# Altium PCB version2.PcbDoc
Units mil, origin at the board's own origin, x right, y up, seen from the top; angles counter-clockwise.
Board outline 4230 x 3620 mil, 2 copper layers (Top Layer, Bottom Layer); 50 components, 105 nets, 238 pads, 27 vias.
Unrouted connection lines stored in the file: 14.
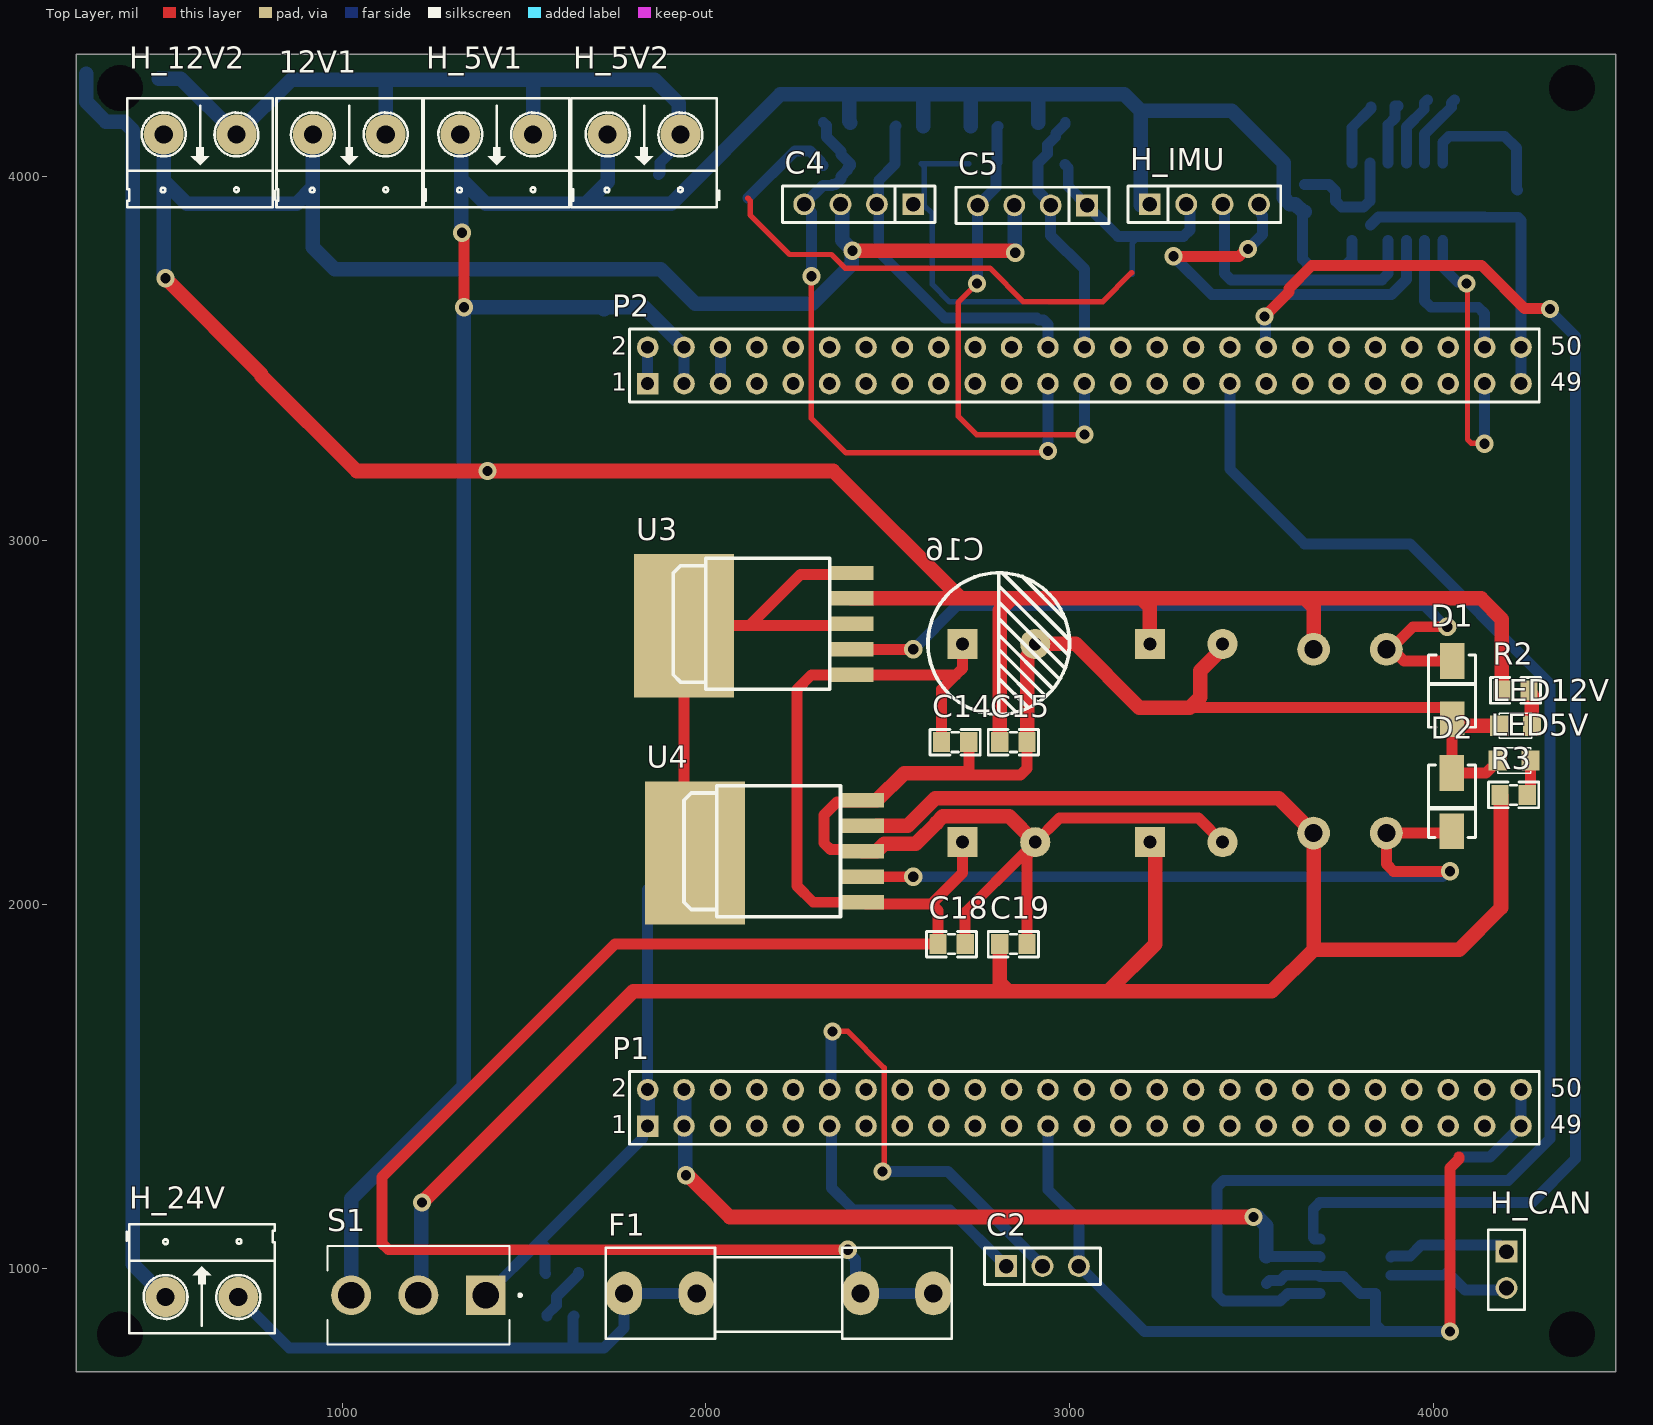
[diagram p0: Top Layer view]
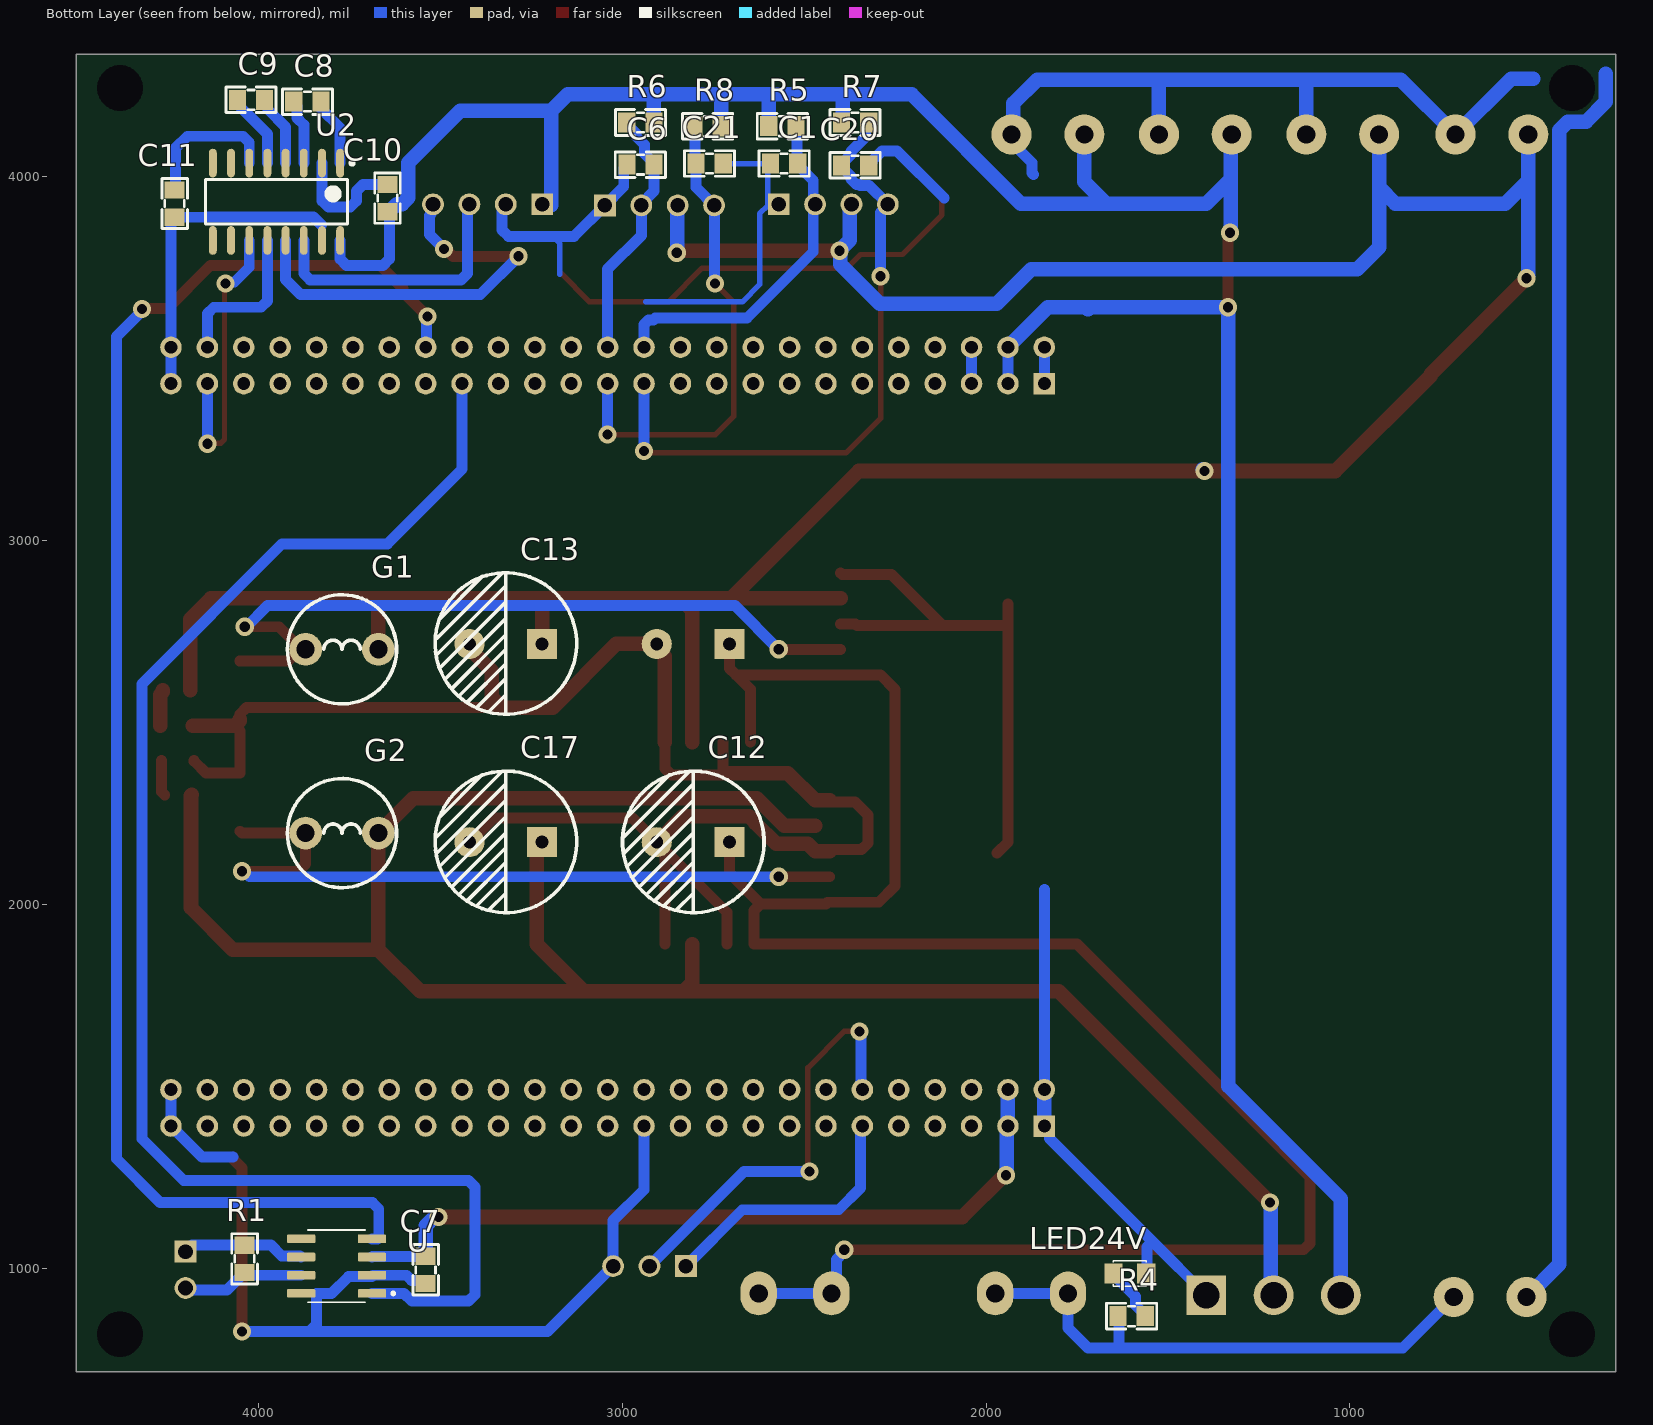
[diagram p1: Bottom Layer view, seen from below]
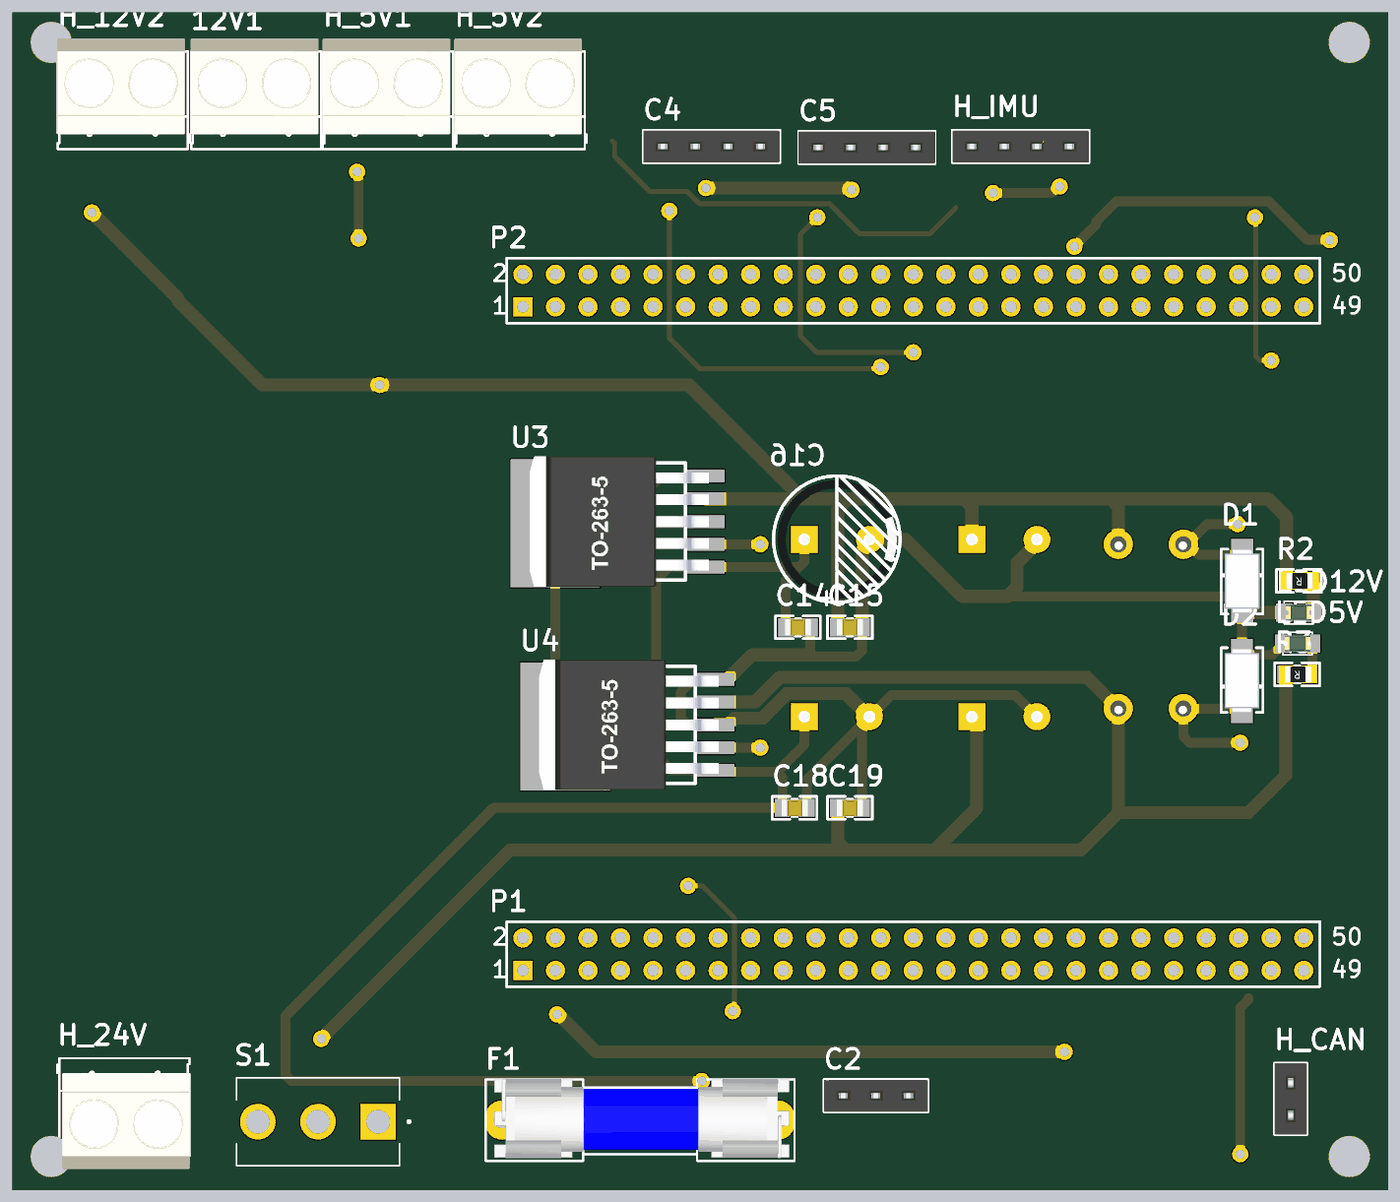
[diagram p2: 3D render of the assembled board from above, using the file's embedded part models]
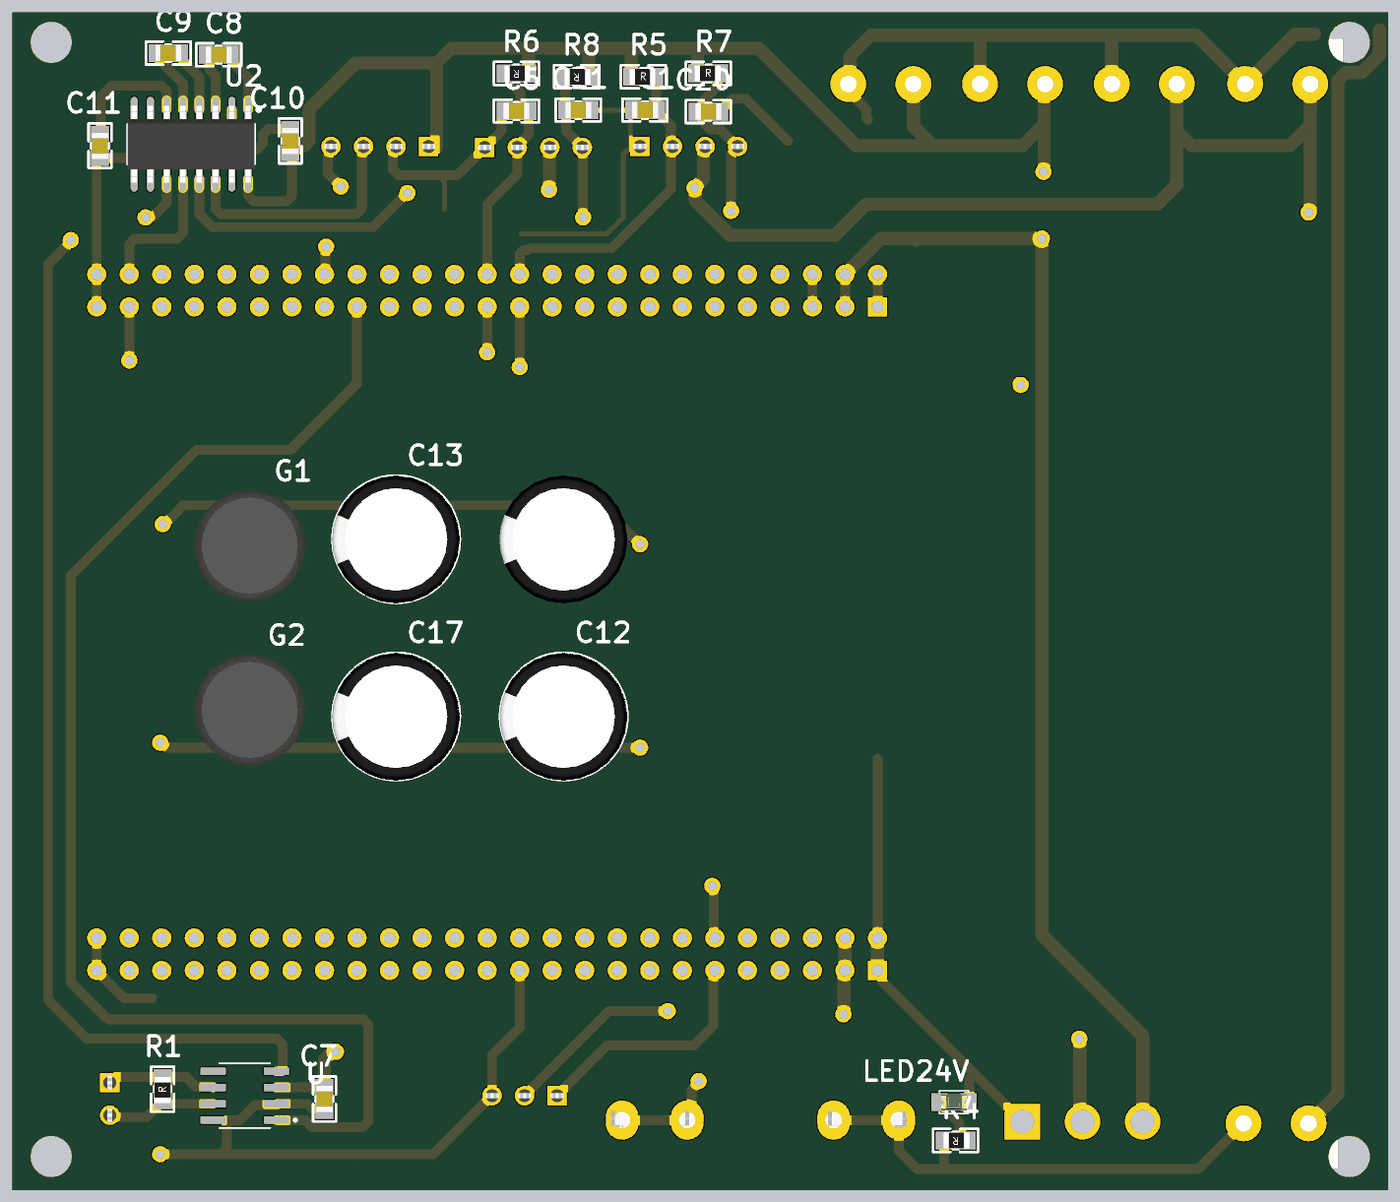
[diagram p3: 3D render of the assembled board from below, using the file's embedded part models]

## Layer stack, top to bottom
Top Solder: solder mask 0.4, Solder Resist, Dk 3.5
Top Layer: signal copper 1.4
Dielectric 1: dielectric 12.6, FR-4, Dk 4.8
Bottom Layer: signal copper 1.4
Bottom Solder: solder mask 0.4, Solder Resist, Dk 3.5

## Board outline
270,716.99 4500,716.99 4500,4336.99 270,4336.99

## Design rules (kind name [scope] priority, off if disabled: settings)
Clearance Clearance_2 [InNamedPolygon('GND_L01_P001')] p1: gap=30 ignorepadtopadclearanceinfootprint=FALSE
Clearance Clearance_1 [InNamedPolygon('NONET_L02_P000')] p2: gap=10 ignorepadtopadclearanceinfootprint=FALSE except(0: Arc-Hole Track-Hole SMDPad-Hole THPad-Hole Via-Hole Fill-Hole Poly-Hole Region-Hole Text-Hole)
Clearance [All] p3: gap=10 ignorepadtopadclearanceinfootprint=FALSE except(0: Arc-Hole Track-Hole SMDPad-Hole THPad-Hole Via-Hole Fill-Hole Poly-Hole Region-Hole Text-Hole)
PolygonConnect PolygonConnect_2 [All vs IsNamedPolygon('GND_L01_P001')] p1: connectstyle=Relief reliefconductorwidth=25 reliefentries=4 polygonreliefangle="90 Angle" airgapwidth=25
PolygonConnect PolygonConnect_1 [All vs IsNamedPolygon('NONET_L02_P000')] p2: connectstyle=Relief reliefconductorwidth=25 reliefentries=4 polygonreliefangle="90 Angle" airgapwidth=25
PolygonConnect [All] p3: connectstyle=Relief reliefconductorwidth=10 reliefentries=4 polygonreliefangle="90 Angle" airgapwidth=10
RoutingVias [All] p1: holewidth=28 width=50 viastyle="Through Hole" minholewidth=28 minwidth=50 maxholewidth=28 maxwidth=50
SolderMaskExpansion [All] p1: expansion=4 istentingtop=FALSE
Width [All] p1: maxlimit=40 minlimit=15 preferedwidth=30
30 further rules are at their usual default settings.

## Components (designator, comment, footprint, x,y, rotation, side; value= is the part's Value field where it differs from the comment)
12V1 "Header 2" HED2 1120,4116.99 r180 top
C1 "104" "tu 0805" 2555,4036.99 r180 bottom
C2 "JP3" JP3-C1T 2825,1006.99 r0 top
C4 "JP4" JP4-C1T 2570,3925 r180 top
C5 "JP4" JP4-C1T 3047.45,3921.99 r180 top
C6 "104" "tu 0805" 2950,4033.99 r180 bottom
C7 "104" "tu 0805" 3540,996.99 r270 bottom
C8 "104" "tu 0805" 3865,4206.99 r0 bottom
C9 "104" "tu 0805" 4020,4211.99 r0 bottom
C10 "104" "tu 0805" 3645,3941.99 r270 bottom
C11 "104" "tu 0805" 4230,3926.99 r270 bottom
C12 "1000uF" "tu hoa 10mm" 2805,2171.99 r0 bottom
C13 "1000uF" "tu hoa 10mm" 3320,2716.99 r0 bottom
C14 "104" "tu 0805" 2685,2446.99 r0 top
C15 "104" "tu 0805" 2845,2446.99 r0 top
C16 "1000uF" "tu hoa 10mm" 2805,2716.99 r0 top
C17 "1000uF" "tu hoa 10mm" 3320,2171.99 r0 bottom
C18 "104" "tu 0805" 2675,1891.99 r0 top
C19 "104" "tu 0805" 2845,1891.99 r0 top
C20 "104" "tu 0805" 2360,4031.99 r180 bottom
C21 "104" "tu 0805" 2760,4036.99 r180 bottom
D1 "SS34" DIODE_DO214AC_SMA 4051,2589.88 r90 top
D2 "SS34" DIODE_DO214AC_SMA 4050,2282.01 r270 top
F1 "F1A" Fuse 2200,931.99 r0 top value=Fuse
G1 "100uH 3A" "CUON CAM 100uH3A" 3770,2701.99 r180 bottom
G2 "100uH 3A" "CUON CAM 100uH3A" 3770,2196.99 r180 bottom
H_5V1 "Header 2" HED2 1525,4116.99 r180 top
H_5V2 "Header 2" HED2 1930,4116.99 r180 top
H_12V2 "Header 2" HED2 710,4116.99 r180 top
H_24V "Header 2" HED2 515,921.99 r0 top
H_CAN "JP2" JP2-C1T 4200,1046.99 r270 top
H_IMU "JP4" JP4-C1T 3220,3925 r0 top
LED5V "LED" LED-0805-Green 4266.17,2396.91 r180 top value="LED 3 - 5 ly 2 Colour"
LED12V "LED" LED-0805-Green 4270,2491.99 r180 top value="LED 3 - 5 ly 2 Colour"
LED24V "LED" LED-0805-Green 1650,986.99 r180 bottom value="LED 3 - 5 ly 2 Colour"
P1 "Header 25X2" HDR2X25 1840,1391.99 r0 top
P2 "Header 25X2" HDR2X25 1840,3431.99 r0 top
R1 "1k" "tro smd 0805" 4040,1026.99 r90 bottom
R2 "1k" "tro smd 0805" 4225,2586.99 r180 top
R3 "1k" "tro smd 0805" 4220,2299.6 r180 top
R4 "1k" "tro smd 0805" 1600,866.99 r0 bottom
R5 "1k" "tro smd 0805" 2560,4141.99 r180 bottom
R6 "1k" "tro smd 0805" 2950,4146.99 r0 bottom
R7 "1k" "tro smd 0805" 2360,4151.99 r180 bottom
R8 "1k" "tro smd 0805" 2765,4136.99 r0 bottom
S1 "100SP3T1B1M2QE" SW_100SP3T1B1M2QE 1210,926.99 r180 top
U "SN65HVD230" SOIC127P599X175-8N 3785,1006.99 r0 bottom
U2 "MAX232" SO16 3950,3931.99 r270 bottom
U3 "LM2576HVS 12.0V SMD" TO263-5 2170,2771.99 r90 top
U4 "LM2576HVS 5.0V SMD" TO263-5 2200,2146.99 r90 top

## Footprints (in the part's own frame and the unit in brackets; to place one, negate y for a bottom-side part, rotate by r counter-clockwise, add the part's x,y. Pads: shape width x height; smd on the part's side, far side on the other; paste and mask are expansions set on the pad)
"CUON CAM 100uH3A" [mil] "100uH3A"
  round 90 hole 50: 1(-100,0) 2(100,0)
  silkscreen extent -150,-150 150,150, body extent -171,-175 171,167, height 394
DIODE_DO214AC_SMA [mm] "Diode 2214AC- SMA type"
  rect 2.5x1.7 smd: 1(-2.032,0) 2(2.032,0)
  silkscreen extent -2.59,-1.63 2.46,1.7, body extent -2.53,-1.35 2.47,1.35, height 2.25
Fuse [mil] "De Fuse"
  oval 100x120 hole 50: 1(-425,0) 1(-225,0) 2(225,0) 2(425,0)
  silkscreen extent -475,-125 475,125, body extent -448,-117 459,127, height 378
HDR2X25 [mm] "Connector; Header; 25x2 Position"
  rect 1.5x1.5 hole 0.9: 1(0,0)
  round 1.5 hole 0.9: 2(0,2.54) 3(2.54,0) 4(2.54,2.54) 5(5.08,0) 6(5.08,2.54) 7(7.62,0) 8(7.62,2.54) 9(10.16,0) 10(10.16,2.54) 11(12.7,0) 12(12.7,2.54) 13(15.24,0) 14(15.24,2.54) 15(17.78,0) 16(17.78,2.54) 17(20.32,0) 18(20.32,2.54) 19(22.86,0) 20(22.86,2.54) 21(25.4,0) 22(25.4,2.54) 23(27.94,0) 24(27.94,2.54) 25(30.48,0) 26(30.48,2.54) 27(33.02,0) 28(33.02,2.54) 29(35.56,0) 30(35.56,2.54) 31(38.1,0) 32(38.1,2.54) 33(40.64,0) 34(40.64,2.54) 35(43.18,0) 36(43.18,2.54) 37(45.72,0) 38(45.72,2.54) 39(48.26,0) 40(48.26,2.54) 41(50.8,0) 42(50.8,2.54) 43(53.34,0) 44(53.34,2.54) 45(55.88,0) 46(55.88,2.54) 47(58.42,0) 48(58.42,2.54) 49(60.96,0) 50(60.96,2.54)
  silkscreen extent -1.27,-1.27 62.23,3.81
HED2 [mil] "Header 2, 2 pin, hight 300mil, Pin to Pin 200, Colour Green"
  round 110 hole 50: 1(0,0) 2(200,0)
  silkscreen extent -106,-100 300,200, body extent -92,-140 302,155, height 394
JP2-C1T [mm] "2 row, straight, gold plating"
  rect 1.52x1.52 hole 1.02: 1(0,0)
  round 1.52 hole 1.02: 2(2.54,0)
  silkscreen extent -1.52,-1.27 4.06,1.27, body extent -1.52,-1.25 4.06,1.25, height 8.51
JP3-C1T [mm] "3 row, straight, gold plating"
  rect 1.52x1.52 hole 1.02: 1(0,0)
  round 1.52 hole 1.02: 2(2.54,0) 3(5.08,0)
  silkscreen extent -1.52,-1.27 6.6,1.27, body extent -1.52,-1.25 6.6,1.25, height 8.51
JP4-C1T [mm] "4 row, straight, gold plating"
  rect 1.52x1.52 hole 1.02: 1(0,0)
  round 1.52 hole 1.02: 2(2.54,0) 3(5.08,0) 4(7.62,0)
  silkscreen extent -1.52,-1.27 9.14,1.27, body extent -1.52,-1.25 9.14,1.25, height 8.51
LED-0805-Green [mil]
  rect 50x55 smd: 1(0,0) 2(90,0)
  silkscreen extent 0,-35 90,35, body extent 5,-25 85,25, height 43
SO16 [mm] "SOIC, 16-Leads, Body 9.90x3.91mm, Pitch 1.27mm, IPC Medium Density"
  oval 2x0.55 smd: 1(-2.7,4.445) 2(-2.7,3.175) 3(-2.7,1.905) 4(-2.7,0.635) 5(-2.7,-0.635) 6(-2.7,-1.905) 7(-2.7,-3.175) 8(-2.7,-4.445) 9(2.7,-4.445) 10(2.7,-3.175) 11(2.7,-1.905) 12(2.7,-0.635) 13(2.7,0.635) 14(2.7,1.905) 15(2.7,3.175) 16(2.7,4.445)
  silkscreen extent -2.82,-4.95 1.55,5.39, body extent -3,-4.95 3,4.95, height 1.4
SOIC127P599X175-8N [mm]
  rrect25% 1.97x0.6 smd: 1(-2.47,1.905) 2(-2.47,0.635) 3(-2.47,-0.635) 4(-2.47,-1.905) 5(2.47,-1.905) 6(2.47,-0.635) 7(2.47,0.635) 8(2.47,1.905)
  silkscreen extent -4.05,-2.52 1.99,2.52
SW_100SP3T1B1M2QE [mm]
  rect 2.775x2.775 / inner round 2.775 / far side rect 2.775x2.775 hole 1.85: 1(-4.7,0)
  round 2.775 hole 1.85: 2(0,0) 3(4.7,0)
  silkscreen extent -7.2,-3.43 6.35,3.43
TO263-5 [mil] "TO263-5"
  rect 39.37x120 smd: 1(-140,-230) 2(-70,-230) 3(0,-230) 4(70,-230) 5(140,-230)
  rect 393.7x275.59 smd: 6(-5,230)
  silkscreen extent -180,-170 180,260, body extent -200,-242 200,310, height 180
"tro smd 0805" [mm]
  rect 1.2x1.4 smd: 1(-0.946,-0.061) 2(0.954,-0.061)
  silkscreen extent -1.75,-0.97 1.75,0.84, body extent -1.56,-0.76 1.44,0.64, height 0.53
"tu 0805" [mm] "Compoment SMD 80x50mil"
  rect 1.2x1.4 smd: 1(-0.946,-0.003) 2(0.954,-0.003)
  silkscreen extent -1.75,-0.89 1.75,0.89, body extent -1.01,-0.64 1.01,0.63, height 0.61
"tu hoa 10mm" [mm]
  rect 2.1x2.1 hole 0.9: 1(-2.54,0)
  round 2.1 hole 0.9: 2(2.54,0)
  silkscreen extent -4.95,-4.96 4.93,4.92, body extent -5,-5 5.01,5, height 20.01

## Part data
12V1 H_5V1 H_5V2 H_12V2 H_24V: "Header, 2-Pin", Manufacturer="Generic Components", Class=Connector
C1 C6 C8 C9 C10 C11 C20 C21: library part "Tu 0805 105 50V 10%", "Dán", Chung_Loai=Dán, Don_Vi=Con, Ma_Hang=MH004552, So_Chan=2, Ten_Linh_Kien="Tụ 0805 105-1uF 10% 50V"
C2: "WR-PHD 2.54 mm Angled Socket Header", Manufacturer="W¨¹rth Elektronik eiSos GmbH", partNo=613003143121, ComponentLink1 Description=Manufacturer, ComponentLink1URL=http://www.we-online.com, ComponentLink2 Description=Datasheet, ComponentLink2URL=http://katalog.we-online.de/em/datasheet/6130xx143121.pdf, Created by="Karrer Zheng", Created Date="29 March 2013", NoPins=03
C4 C5 H_IMU: "WR-PHD 2.54 mm Angled Socket Header", Manufacturer="W¨¹rth Elektronik eiSos GmbH", partNo=613004143121, ComponentLink1 Description=Manufacturer, ComponentLink1URL=http://www.we-online.com, ComponentLink2 Description=Datasheet, ComponentLink2URL=http://katalog.we-online.de/em/datasheet/6130xx143121.pdf, Created by="Karrer Zheng", Created Date="29 March 2013", NoPins=04
C7 C14 C15 C18 C19: library part "Tu 0805 104 50V 10%", "Dán", Chung_Loai=Dán, Don_Vi=Con, Ma_Hang=MH004551, So_Chan=2, Ten_Linh_Kien="Tụ 0805 104-100nF 10% 50V"
C12 C13 C16 C17: library part "Tu Hoa 1000uF 10V 10x12", "Cắm", Chung_Loai=Cắm, Don_Vi=Con, Ma_Hang=MH006614, So_Chan=2, Ten_Linh_Kien="Tụ Hóa 1000uF 10V 10x12MM"
D1 D2: "DIODE SCHOTTKY 40V 3A SMA", MPN=SS34, Solder=SMT
F1: library part Fuse, "Fuse", Designed by=VanDungEvn
G1 G2: library part "CUON CAM 100uH DIP", "Dán", Chung_Loai=Dán, Don_Vi=Con, Ma_Hang=MH002209, Ten_Linh_Kien="Cuộn Cảm 100uH 3A 8x10MM"
H_CAN: "WR-PHD 2.54 mm Angled Socket Header", Manufacturer="W¨¹rth Elektronik eiSos GmbH", partNo=613002143121, ComponentLink1 Description=Manufacturer, ComponentLink1URL=http://www.we-online.com, ComponentLink2 Description=Datasheet, ComponentLink2URL=http://katalog.we-online.de/em/datasheet/6130xx143121.pdf, Created by="Karrer Zheng", Created Date="29 March 2013", NoPins=02
LED5V LED12V LED24V: library part "LED SMD"
P1 P2: "Header, 25-Pin, Dual row", LatestRevisionDate=17-Jul-2002, LatestRevisionNote="Re-released for DXP Platform.", Publisher="Altium Limited"
R1 R2 R3 R4 R5 R6 R7 R8: library part "Tro 0805 1% 470k", "Dán", Chung_Loai=Dán, Don_Vi=Con, Ma_Hang=MH005485, So_Chan=2, Ten_Linh_Kien="Trở 0805 1% 470k"
S1: Package=None, Availability=Unavailable, MF="{'manufacturer': u'E-Switch'}", MP=100SP3T1B1M2QE, Price=None
U: "1/1 Transceiver Half CANbus 8-SOIC", Package="SOIC-8 Texas Instruments", Availability=Unavailable, MF="Texas Instruments", MP=SN65HVD230, Price=None, SnapEDA_Link=https://www.snapeda.com/parts/SN65HVD230/Texas%20Instruments/view-part/558072/?ref=snap
U2: "RS232 LEVEL SHIFTER", Manufacturer="Texas Instruments", Manufacturer Part Number=MAX232DR, Package / Case="16-SOIC (3.9mm Width)", Supplier Part Number=296-14619-1-ND, Voltage - Supply="4.5 V ~ 5.5 V", Category="Integrated Circuits (ICs)", Number of Drivers/Receivers=2/2, Packaging="Cut Tape (CT)", Protocol=RS232, RoHS="RoHS Compliant", Supplier=Digi-Key, Supplier 1=Digi-Key, Supplier Part Number 1=296-14619-1-ND, Type=Transceiver
U3: library part "LM2576HVS 5.0V SMD", "Dán", Chung_Loai=Dán, Don_Vi=Con, Ma_Hang=MH002362, Ten_Linh_Kien="LM2576HVS-5.0V BUCK 5V 3A TO263-5"
U4: "Dán", Chung_Loai=Dán, Don_Vi=Con, Ma_Hang=MH002362, Ten_Linh_Kien="LM2576HVS-5.0V BUCK 5V 3A TO263-5"

## Free pads (board coordinates)
  round 60 hole 125.98: 2(4380,4245) 3(4380,820) 4(390,820) 5(390,4245)

## Via types
v1: diameter 50, hole 28, Top Layer to Bottom Layer, 27 vias

## Nets (pads, with @x,y where several pads share a name; then routed paths per layer and width w, separated by ;. In a path a pad name is that pad's centre, name@x,y a point inside that pad or via, vN(x,y) a via of type N, cw(c..) or ccw(c..) an arc to the next point about the centre after c; other vN are vias at no path point)
3.3V: P2.5 P2.6 | length 100
  Bottom Layer w30: P2.5 P2.6
5V: C10.2 H_5V1.2 H_5V2.2 H_IMU.1 P2.3 P2.4 R5.1 R6.1 R7.1 R8.1 S1.3 U2.16 | length 7877.1
  Top Layer w30: v1(1330,3846.99) 1335,3841.99 v1(1335,3641.99)
  Bottom Layer w30: P2.3 P2.4 ; C10.2 3640,3899.28 3640,3774.56 3657.57,3756.99 3757.43,3756.99 3775,3774.56 U2.16
  Bottom Layer w40: S1.3 1024.96,1191.95 1335,1501.99 v1(1335,3641.99) 1715,3641.99 ; H_5V1.2 1328.09,4113.9 1328.09,3993.9 ; v1(1330,3846.99) 1328.09,3848.9 1328.09,3993.9 ; 1720,3636.99 1715,3641.99 ; H_5V2.2 1730,3986.99 1670,3926.99 ; P2.4 1830,3641.99 1715,3641.99 ; R7.1 2393.61,4153.22 2393.61,4223.38 2390,4226.99 ; R5.1 2596.79,4140.03 2596.79,4226.99 ; 2724.72,4217.27 2727.77,4214.22 R8.1 ; R6.1 2912.77,4213.32 2899.1,4226.99 ; H_IMU.1@3195,3921.99 3195,4181.99 ; C10.2 3641.2,3904.42 3620.02,3925.6 3605.15,3925.6 3587.57,3943.17 3587.57,4039.42 3445,4181.99 3195,4181.99 ; 1328.09,3993.9 1395,3926.99 1670,3926.99 ; 1670,3926.99 1905,3926.99 2205,4226.99 2390,4226.99 ; 2390,4226.99 2596.79,4226.99 ; 2596.79,4226.99 2724.72,4226.99 2899.1,4226.99 ; 2899.1,4226.99 3150,4226.99 3195,4181.99
5V.1: C17.1 C19.1 G2.2 R3.2 S1.2 U4.4 | length 6071.7
  Top Layer w40: v1(1220,1181.99) 1800,1761.99 2831.2,1761.99 ; U4.4@2470,2217.31 2554.5,2217.31 2630.52,2293.33 3573.66,2293.33 G2.2 3670,1876.99 ; C19.1 2807.77,1785.42 2831.2,1761.99 ; C17.1 3235,2156.99 3235,1891.99 3105,1761.99 ; R3.2 4185,2299.42 4185,1991.99 4070,1876.99 3670,1876.99 ; 2831.2,1761.99 3105,1761.99 ; 3105,1761.99 3555,1761.99 3670,1876.99
  Bottom Layer w40: S1.2 1218.09,935.08 1218.09,1180.08 v1(1220,1181.99)
12V: 12V1.2 C4.3 C5.3 C13.1 C15.1 G1.2 H_12V2.2 R2.2 U3.4 | length 8762.4
  Top Layer w40: v1(515,3721.99) 778.46,3458.53 778.46,3453.53 1040,3191.99 v1(1400,3191.99) 1750,3191.99 2350,3191.99 2700,2841.99 ; U3.4 2700,2841.99 ; v1(2402.45,3797.25) 2842.03,3797.25 2847.29,3791.99 v1(2850,3791.99) ; C15.1 2807.77,2809.76 2840,2841.99 ; C13.1 3220,2818.56 3196.57,2841.99 ; G1.2 3670,2816.99 3645,2841.99 ; R2.2 4187.43,2784.57 4130,2841.99 3645,2841.99 ; 2700,2841.99 2840,2841.99 ; 2840,2841.99 3196.57,2841.99 ; 3196.57,2841.99 3645,2841.99
  Bottom Layer w40: H_12V2.2 510,3990.42 ; v1(515,3721.99) 515,3724.7 510,3729.7 510,3990.42 ; 12V1.2 920,3971.99 ; v1(1400,3191.99) v1@1405,3196.99 ; C4.3@2375,3917.35 2373.8,3916.15 2373.8,3907.17 2375,3905.97 2375,3825.68 2402.45,3798.24 v1(2402.45,3797.25) 2400.53,3795.34 2400.53,3759.74 2292.78,3651.99 1971.07,3651.99 1876.07,3746.99 980,3746.99 920,3806.99 920,3971.99 ; C5.3 2848.73,3920.72 2848.73,3793.26 v1(2850,3791.99) ; 510,3990.42 573.43,3926.99 875,3926.99 920,3971.99
24V: F1.1 H_24V.2 R4.2 | length 1524.2
  Bottom Layer w30: H_24V.2 855,781.99 1635,781.99 ; R4.2 1635,866.81 1635,781.99 ; F1.1@1975,931.99 1775,931.99 1775,836.99 1720,781.99 1635,781.99
BOOT0: P2.21
GND: 12V1.1 C1.1 C2.3 C4.1 C5.1 C6.1 C7.2 C11.2 C12.2 C13.2 C14.2 C15.2 C16.2 C17.2 C18.2 C19.2 C20.2 C21.2 D1.1 D2.1 H_5V1.1 H_5V2.1 H_12V2.1 H_24V.1 H_IMU.2 LED5V.2 LED12V.2 LED24V.2 P1.1 P1.2 P1.5 P1.23 P1.49 P1.50 P2.1 P2.2 P2.49 P2.50 S1.1 U2.15 U3.3 U3.5 U3.6 U4.3 U4.5 U4.6 U.2 U.8 | length 20017.7
  Top Layer w10: P1.1@1835,1391.99 1835.09,1391.33 P1.1@1838.28,1367.46
  Top Layer w15: 2115,3941.99 2121.7,3935.29 2121.7,3895.54 2230.25,3786.99 2345,3786.99 2359.95,3772.04 2382.5,3749.49 2780.21,3749.49 2872.71,3656.99 2935,3656.99 3090,3656.99 3170,3736.99
  Top Layer w30: U3.6@1940,2826.05 U3.6 ; U4.6 1940,2171.99 U3.6 ; U3.3 2359.69,2771.99 2354.69,2766.99 2120,2766.99 ; U3.5 2395.31,2907.31 2260.31,2907.31 2120,2766.99 ; U4.3 2425.31,2151.68 2342.57,2151.68 2325,2169.25 2325,2246.99 2360.31,2282.31 2425.31,2282.31 U4.5 ; C18.2 2712.57,1979.57 2875.45,2142.44 ; C14.2 2722.57,2361.99 2727.57,2356.99 2865,2356.99 2882.57,2374.56 C15.2 ; C19.2 2882.57,2135.31 2905,2157.74 C12.2 2971.34,2238.33 3353.66,2238.33 C17.2 ; 3330,2541.99 4032.54,2541.99 4051,2523.53 D1.1 ; v1(4045,826.99) 4045,1276.58 4070,1301.58 4070,1306.99 ; D1.1@4064.46,2491.99 4050.5,2478.03 4050.5,2362.52 D2.1 4143.78,2362.02 4176.17,2394.41 LED5V.2 ; U3.6 2120,2766.99
  Top Layer w40: U4.3 2469.69,2146.99 2490,2167.31 2576.71,2167.31 2633.66,2224.25 2633.66,2225.76 2651.24,2243.33 2833.02,2243.33 2904.36,2171.99 C12.2 ; U4.5 2469.69,2286.99 2544.69,2361.99 2722.57,2361.99 ; C15.2 2882.57,2683.02 2905,2705.44 C16.2 3015.77,2716.99 3190.77,2541.99 3330,2541.99 3358.28,2570.27 3358.28,2643.73 3420,2705.44 C13.2 ; D1.1 4051,2505.45 4064.46,2491.99 LED12V.2
  Bottom Layer w15: C21.2 C1.1 2599.89,4029.19 2599.89,3921.99 2622.31,3899.57 2622.31,3704.68 2670,3656.99 2935,3656.99 ; 3171.33,3732.2 3171.33,3817.09 3191.23,3836.99
  Bottom Layer w30: S1.1 1542.52,1074.47 ; LED24V.2 1557.5,989.49 1557.5,1059.49 1542.52,1074.47 ; P1.1 1825.47,1377.46 1825.47,1357.42 1542.52,1074.47 ; P1.2 1840,2041.99 ; P2.1 P2.2 ; 1870,4006.99 1873.83,4010.82 1873.83,4039.17 1930,4095.34 H_5V2.1 ; 2115,3941.99 2244.87,4071.86 2286.57,4071.86 2313.8,4044.62 2313.8,4040.48 C20.2 ; P1.23 2940,1216.99 3025,1131.99 C2.3 3205,826.99 3860,826.99 ; C6.1 2995.85,4025.23 2995.85,3973.59 C5.1 3132.45,3836.99 3191.23,3836.99 3312.43,3836.99 3330,3854.56 H_IMU.2@3330,3906.4 ; C7.2 3548.76,968.04 3578.72,968.04 3592.68,981.99 3684.57,981.99 3687.76,978.8 3751.65,978.8 3798.46,931.99 3840.35,931.99 3840.35,846.64 3860,826.99 ; 3826.14,3868.13 3848.07,3890.06 4139.84,3890.06 4140.49,3889.42 C11.2 4231.38,3889.42 4240,3880.79 P2.50 P2.49 ; v1(4045,826.99) 3860,826.99 ; 4070,1306.99 4155,1306.99 P1.49 P1.50
  Bottom Layer w40: 297.01,4283.52 297.01,4206.48 351.48,4152.01 401.57,4152.01 425,4128.58 425,1011.99 H_24V.1 ; 496.51,4270 556.99,4270 H_12V2.1 860,4266.99 1110,4266.99 ; 12V1.1 1120,4256.99 1110,4266.99 ; H_5V1.1 1525,4256.99 1515,4266.99 ; P1.1 P1.2 ; H_5V2.1 1925,4121.99 1925,4201.99 1860,4266.99 1515,4266.99 ; 1110,4266.99 1515,4266.99
IMU_RX: H_IMU.3 U2.14 | length 729.8
  Bottom Layer w30: H_IMU.3@3425,3908.66 3425,3734.56 3442.57,3716.99 3857.43,3716.99 3875,3734.56 U2.14
IMU_TX: H_IMU.4 U2.13 | length 1155
  Top Layer w30: v1(3285,3781.99) 3464.59,3781.99 3484.59,3801.99 v1(3490,3801.99)
  Bottom Layer w30: v1(3285,3781.99) 3390,3676.99 3883.99,3676.99 3925,3718 U2.13 ; v1(3490,3801.99) 3530,3841.99 3530,3893.9 3525.71,3898.19 3525.71,3911.21 H_IMU.4@3529.9,3915.4
NetC8_1: C8.1 U2.1 | length 175.7
  Bottom Layer w30: U2.1 3775,4135.42 3827.77,4188.19 C8.1@3827.77,4192.12
NetC8_2: C8.2 U2.3 | length 172.7
  Bottom Layer w30: U2.3 3875,4143.56 3893.95,4162.51 3893.95,4194.57 C8.2@3902.57,4194.57
NetC9_1: C9.1 U2.4 | length 197.8
  Bottom Layer w30: U2.4 3925,4136.99 3974.15,4186.14 3974.15,4203.5 C9.1
NetC9_2: C9.2 U2.5 | length 208.5
  Bottom Layer w30: U2.5 3975,4118.56 4011.61,4155.16 4012.35,4155.16 4048.95,4191.77 4048.95,4203.5 C9.2
NetC10_1: C10.1 U2.2 | length 332.5
  Bottom Layer w30: C10.1 3712.23,3979.22 3729.8,3961.64 3729.8,3934.56 3747.38,3916.99 3807.43,3916.99 3825,3934.56 U2.2
NetC11_1: C11.1 U2.6 | length 395.7
  Bottom Layer w30: U2.6 4025,4094.42 4042.57,4111.99 4195,4111.99 4227.23,4079.76 4227.23,3967.12 C11.1
NetC12_1: C12.1 C14.1 C16.1 C18.1 F1.2 U3.1 U4.1 | length 5608.2
  Top Layer w30: v1(2390,1051.99) 1127.57,1051.99 1110,1069.56 1110,1251.99 1454.53,1596.52 1749.87,1891.86 C18.1 2637.77,1984.73 2620.2,2002.31 ; F1.2@2425,931.99 F1.2@2425,941.99 ; C14.1 2647.77,2592.34 2687.43,2631.99 ; C12.1 2705,2087.11 2620.2,2002.31 ; C16.1 2705,2649.56 2687.43,2631.99 ; 2620.2,2002.31 2440,2002.31 2435.31,2006.99 U4.1 2295,2006.99 2250,2051.99 2250,2591.99 2290,2631.99 U3.1 2687.43,2631.99
  Bottom Layer w30: v1(2390,1051.99) 2390,1046.58 2411.61,1024.97 2411.61,945.38 2425,931.99 F1.2@2625,931.99
NetD1_2: D1.2 G1.1 U3.2 | length 2098
  Top Layer w30: U3.2 v1(2570,2701.99) ; v1(4037.14,2764.13) 3942.79,2764.13 3880.64,2701.99 G1.1 3886.24,2701.99 3918.33,2669.9 D1.2
  Bottom Layer w30: v1(2570,2701.99) 2690,2821.99 3974.79,2821.99 4032.65,2764.13 v1(4037.14,2764.13)
NetD2_2: D2.2 G2.1 U4.2 | length 2071.6
  Top Layer w30: U4.2 v1(2570,2076.99) ; v1(4045,2091.99) 3890,2091.99 3870,2111.99 G2.1 4045,2196.99 D2.2
  Bottom Layer w30: v1(2570,2076.99) 4024.59,2076.99 4039.59,2091.99 v1(4045,2091.99)
NetH_CAN_1: H_CAN.1 R1.2 U.6 | length 338.5
  Bottom Layer w30: U.6 3885.43,1035.18 3935.66,1035.18 3965.05,1064.57 R1.2 4182.43,1064.57 H_CAN.1
NetH_CAN_2: H_CAN.2 R1.1 U.7 | length 325.7
  Bottom Layer w30: U.7 4029.83,981.99 R1.1 ; R1.1@4050.17,977.2 4086.09,941.28 4194.29,941.28 H_CAN.2
NetLED5V_1: LED5V.1 R3.1 | length 98.6
  Top Layer w30: R3.1 4265.85,2310.61 4265.85,2331.79 4266.17,2332.11 LED5V.1
NetLED12V_1: LED12V.1 R2.1 | length 100.6
  Top Layer w40: R2.1 4262.23,2585.45 4270,2577.68 LED12V.1
NetLED24V_1: LED24V.1 R4.1 | length 156.2
  Bottom Layer w30: R4.1 1562.77,873.32 1588.95,899.5 1588.95,923.44 1650,984.49 LED24V.1 LED24V.1@1650,989.49
NRST: P1.6
PA0: C2.2 P1.12 | length 1181.7
  Top Layer w15: v1(2347.71,1651.99) 2390,1651.99 2490,1551.99 2490,1271.99 v1(2485,1266.99)
  Bottom Layer w30: P1.12 2343.88,1495.87 2343.88,1648.16 v1(2347.71,1651.99) ; v1(2485,1266.99) 2665,1266.99 C2.2
PA1: C2.1 P1.11 | length 741.1
  Bottom Layer w30: P1.11 2345.22,1386.77 2345.22,1221.77 2405,1161.99 2670,1161.99 C2.1
PA2: P1.14
PA3: P1.13
PA4: P1.16
PA5: P1.15
PA6: P1.18
PA7: P1.17
PA8: P2.43
PA9: P2.44
PA10: P2.41
PA13: P2.42
PA14: P2.39
PA15: P2.40
PB0: P1.22
PB1: P1.21
PB2: P1.24
PB3: P2.28
PB4: C5.4 C21.1 P2.25 R8.2 | length 1350.1
  Top Layer w15: v1(2745,3706.99) 2692.97,3654.96 2692.97,3342.8 2743.79,3291.99 v1(3040,3291.99)
  Bottom Layer w30: v1(2745,3706.99) 2746.23,3708.22 2746.23,3920.76 2797.23,3971.77 C21.1 2799.9,4039.53 2799.9,4136.71 R8.2 ; v1(3040,3291.99) P2.25
PB5: C5.2 C6.2 P2.26 R6.2 | length 701.4
  Bottom Layer w30: R6.2 2987.57,4145.45 2961.39,4119.27 2961.39,4111.47 2938.61,4088.68 2938.61,4063.97 2912.43,4037.79 C6.2 2912.43,3961.3 2947.45,3926.27 C5.2 2947.45,3839.54 3040,3746.99 P2.26
PB6: C4.4 C20.1 P2.23 R7.2 | length 1799.8
  Top Layer w15: v1(2290,3726.99) 2290,3336.99 2385,3241.99 2935,3241.99 v1(2940,3246.99)
  Bottom Layer w30: v1(2290,3726.99) 2290,3901.92 2270,3921.92 C4.4 2321.87,3976.87 2346.18,3976.87 2348.61,3979.3 2356.4,3979.3 2371.05,3993.94 2371.05,4001.74 2388.61,4019.3 2388.61,4023.23 C20.1 2397.23,4035.79 2371.05,4061.97 2371.05,4069.77 2331.05,4109.77 2331.05,4140.97 R7.2 ; v1(2940,3246.99) P2.23
PB7: C1.2 C4.2 P2.24 R5.2 | length 975
  Bottom Layer w30: R5.2 2519.93,4137.1 2519.93,4035.42 2475,3990.49 2475,3794.56 2657.57,3611.99 2909.29,3611.99 2914.29,3606.99 2927.43,3606.99 2940,3594.42 P2.24
PB8: P2.19
PB9: P2.20
PB10: P1.34
PB11: P1.35
PB12: P1.36
PB13: P1.37
PB14: P1.38
PB15: P1.39
PC0: P1.8
PC1: P1.7
PC2: P1.10
PC3: P1.9
PC4: P1.20
PC5: P1.19
PC6: P2.47 U2.11 | length 803.7
  Top Layer w15: v1(4090,3706.99) 4092.97,3704.02 4092.97,3278.77 4103.79,3267.95 4139.04,3267.95 v1(4140,3266.99)
  Bottom Layer w30: U2.11 4025,3751.99 4066.17,3710.82 4086.17,3710.82 v1(4090,3706.99) ; v1(4140,3266.99) P2.47
PC7: P2.48 U2.12 | length 438.1
  Bottom Layer w30: U2.12 3975,3659.56 3992.57,3641.99 4122.43,3641.99 4140,3624.42 P2.48
PC8: P2.45
PC9: P2.46
PC10: P2.37
PC11: P2.38
PC12: P2.35
PC13: P2.12
PC14: P2.9
PC15: P2.10
PD0: P2.36 U.4 | length 4226.6
  Top Layer w30: v1(3535,3616.99) 3601.91,3683.9 3601.91,3693.9 3665,3756.99 4131.94,3756.99 4250,3638.93 4318.06,3638.93 v1(4320,3636.99)
  Bottom Layer w30: v1(3535,3616.99) 3537.5,3614.49 3537.5,3534.49 P2.36 ; U.4 3672.33,1081.99 3669.14,1085.18 3669.14,1164.42 3686.72,1181.99 4270,1181.99 4390,1301.99 4390,3561.58 4320,3631.58 v1(4320,3636.99)
PD1: P2.33 U.1 | length 4174.2
  Bottom Layer w30: P2.33 3440,3196.99 3645,2991.99 3935,2991.99 4320,2606.99 4320,1356.99 4205,1241.99 3422.57,1241.99 3405,1224.42 3405,928.37 3422.57,910.79 3578.05,910.79 3599.25,931.99 U.1
PD2: P2.34
PD3: P2.31
PD4: P2.32
PD5: P2.29
PD6: P2.30
PD7: P2.27
PD8: P1.40
PD9: P1.41
PD10: P1.42
PD11: P1.43
PD12: P1.44
PD13: P1.45
PD14: P1.46
PD15: P1.47
PE0: P2.17
PE1: P2.18
PE2: P2.15
PE3: P2.16
PE4: P2.13
PE5: P2.14
PE6: P2.11
PE7: P1.25
PE8: P1.26
PE9: P1.27
PE10: P1.28
PE11: P1.29
PE12: P1.30
PE13: P1.31
PE14: P1.32
PE15: P1.33
PH0: P2.7
PH1: P2.8
VDD: C7.1 P1.3 P1.4 P2.22 U.3 | length 2122.4
  Top Layer w40: v1(1945,1256.99) 1950,1256.99 2065,1141.99 v1(3505,1141.99)
  Bottom Layer w30: C7.1 3541.25,1033.1 3686.64,1033.1 U.3
  Bottom Layer w40: P1.4 P1.3 1943.09,1388.9 1943.09,1258.9 v1(1945,1256.99) ; v1(3505,1141.99) 3516.7,1141.99 3540.13,1118.56 C7.1
pads on no net: P1.48 U2.7 U2.8 U2.9 U2.10 U.5

## Text inside footprints (layer, text, board x,y; h text height)
P1: Top Overlay "2" at 1740,1471.99 h50; Top Overlay "1" at 1740,1371.99 h50; Top Overlay "49" at 4320,1371.99 h50; Top Overlay "50" at 4320,1471.99 h50
P2: Top Overlay "2" at 1740,3511.99 h50; Top Overlay "1" at 1740,3411.99 h50; Top Overlay "49" at 4320,3411.99 h50; Top Overlay "50" at 4320,3511.99 h50